# EAGLE board FF-Adapters (EAGLE 7.0.0)
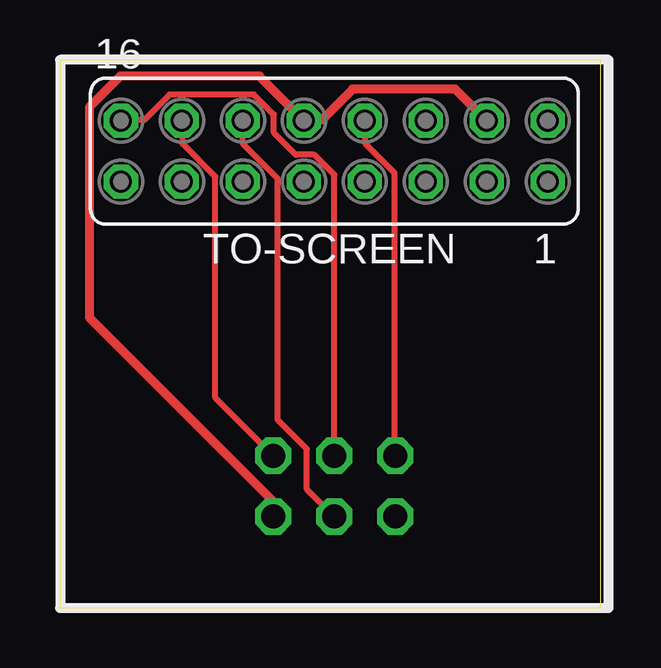
[diagram p0: board, top side]
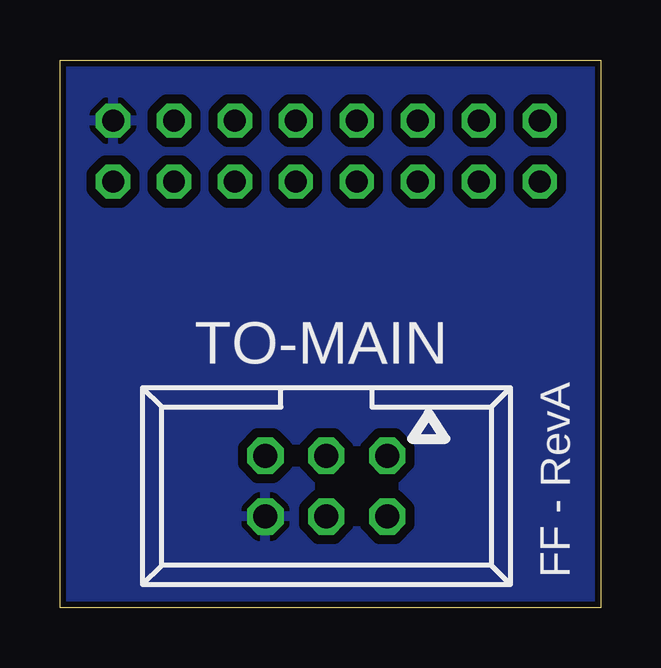
[diagram p1: board, bottom side, seen from below]

Size 22.53 x 22.85 mm. Coordinates in mm from the lower left corner, seen from the top.
Outline: 0,0 22.53,0 22.53,22.85 0,22.85 0,0
Copper layers (1*16): Top 0.035mm / dielectric 1.5mm / Bottom 0.035mm
Design rules "ITEADstudio_DRC": minimum track width 6mil, minimum drill 12mil, track to track 6mil, track to pad 6mil, pad to pad 6mil, via to via 6mil, smd to smd 0mil, copper to edge 10mil, drill to drill 10mil, minimum pad ring 10mil, minimum via ring 6mil, stop-mask expansion 2mil, vias tented up to drill 100mil, thermal gap 10mil
Net classes: 1 Power: width 0.381 mm, drill 0.381 mm, clearance 0.381 mm; 2 signal: width 0.254 mm, drill 0.254 mm, clearance 0.254 mm

## Footprints (pad centres in the part's own frame; a part is rotated, then mirrored left to right if it is on the bottom)
057-006-1 = drill 1 octagon: 1 -2.54,-1.27; 2 -2.54,1.27; 3 0,-1.27; 4 0,1.27; 5 2.54,-1.27; 6 2.54,1.27
FE08-2 = drill 0.914 octagon: 1 -8.89,1.27; 2 -8.89,-1.27; 3 -6.35,1.27; 4 -6.35,-1.27; 5 -3.81,1.27; 6 -3.81,-1.27; 7 -1.27,1.27; 8 -1.27,-1.27; 9 1.27,1.27; 10 1.27,-1.27; 11 3.81,1.27; 12 3.81,-1.27; 13 6.35,1.27; 14 6.35,-1.27; 15 8.89,1.27; 16 8.89,-1.27

## Placement (x,y rotation side)
TO-MAIN  057-006-1  [057-006-1]  11.43,5.08 180 bottom
TO-SCREEN  [FE08-2]  11.43,19.05 180 top

## Library data of the parts
TO-MAIN = con-panduit; OC_FARNELL: unknown; OC_NEWARK: unknown
TO-SCREEN = con-lsta; OC_FARNELL: unknown; OC_NEWARK: unknown

## Nets
5V [Power]: TO-MAIN.2 TO-SCREEN.4 TO-SCREEN.10
CLK [signal]: TO-MAIN.1 TO-SCREEN.14
DISP_A0 [signal]: TO-MAIN.4 TO-SCREEN.12
GND [Power]: TO-MAIN.6 TO-SCREEN.2
MOSI [signal]: TO-MAIN.3 TO-SCREEN.16
SELECT [signal]: TO-MAIN.5 TO-SCREEN.8

## Tracks (layer width: path | path; a pad name or v marks a point on that pad's centre or on a via)
5V
  Top 0.381: TO-SCREEN.4 16.46,21.64 12.19,21.64 10.9,20.34 10.21,20.34 TO-SCREEN.10 8.31,22.17 2.52,22.17 1.22,20.88 1.22,12.12 8.84,4.5 8.84,3.81 TO-MAIN.2
CLK
  Top 0.254: TO-MAIN.1 6.48,8.76 6.48,17.98 5.11,19.36 5.11,20.27 TO-SCREEN.14
DISP_A0
  Top 0.254: TO-SCREEN.12 7.62,19.36 9.07,17.91 9.07,7.85 10.29,6.63 10.29,4.95 TO-MAIN.4
GND
  pour Bottom: 0,22.86 22.86,22.86 22.86,0 0,0
MOSI
  Top 0.254: TO-MAIN.3 11.43,18.06 10.59,18.9 9.83,18.9 8.91,19.81 8.91,20.57 8.08,21.41 4.57,21.41 3.5,20.34 2.59,20.34 TO-SCREEN.16
SELECT
  Top 0.254: TO-SCREEN.8 12.72,20.27 12.72,19.36 13.95,18.14 13.95,6.4 TO-MAIN.5

## Text on the board
bNames: FF - RevA